# Altium PCB (2023-EE-021)Exp-6 rev_1.PcbDoc
Units mm, origin at the board's own origin, x right, y up, seen from the top; angles counter-clockwise.
Board outline 100.46 x 101.47 mm, 2 copper layers (Top Layer, Bottom Layer); 85 components, 132 nets, 297 pads, 76 vias.
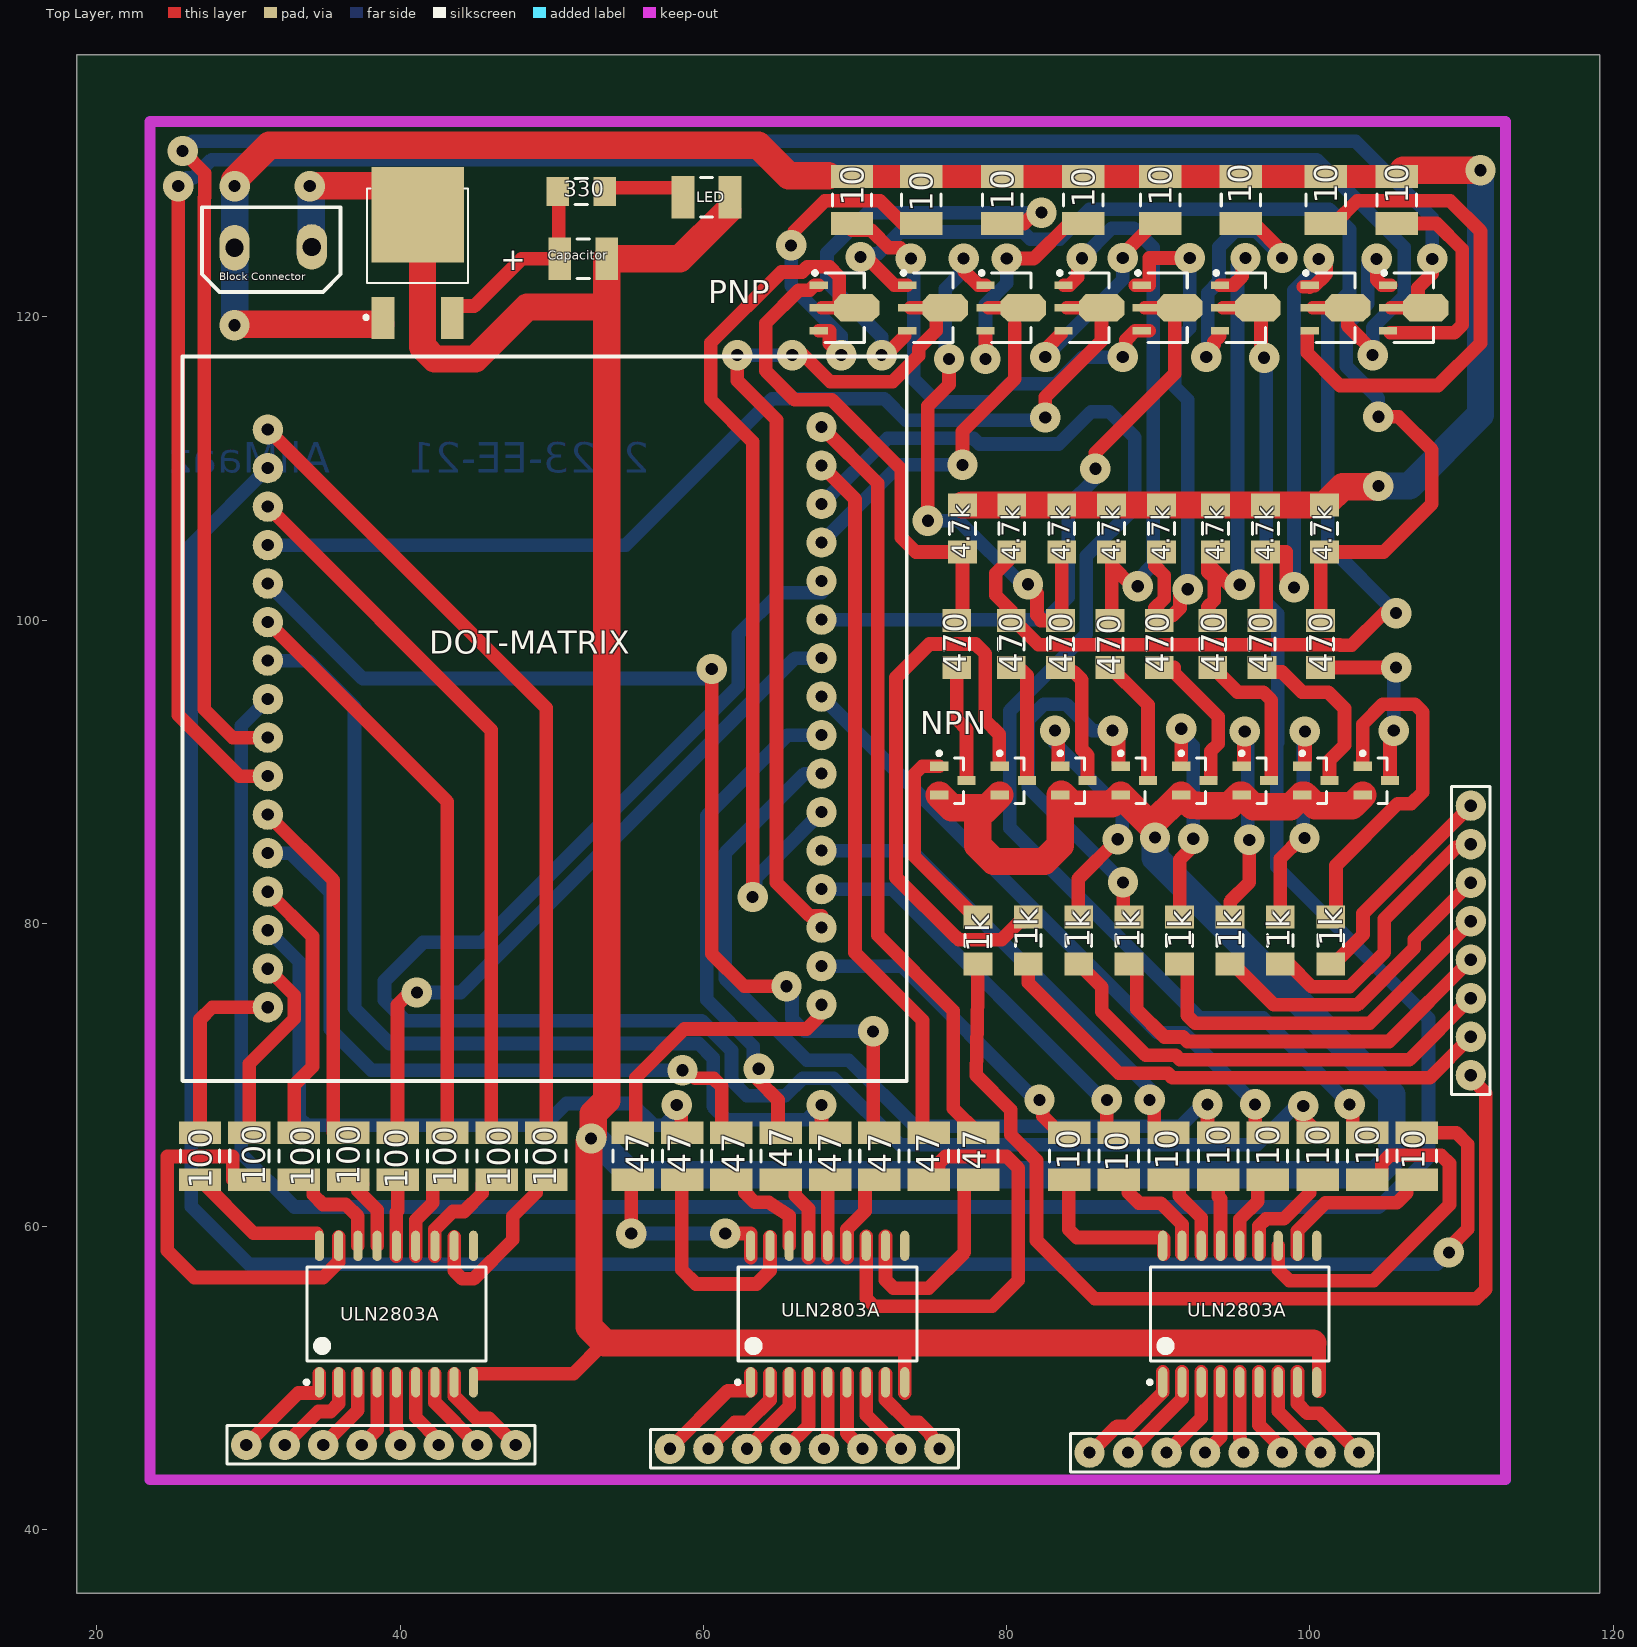
[diagram p0: Top Layer view]
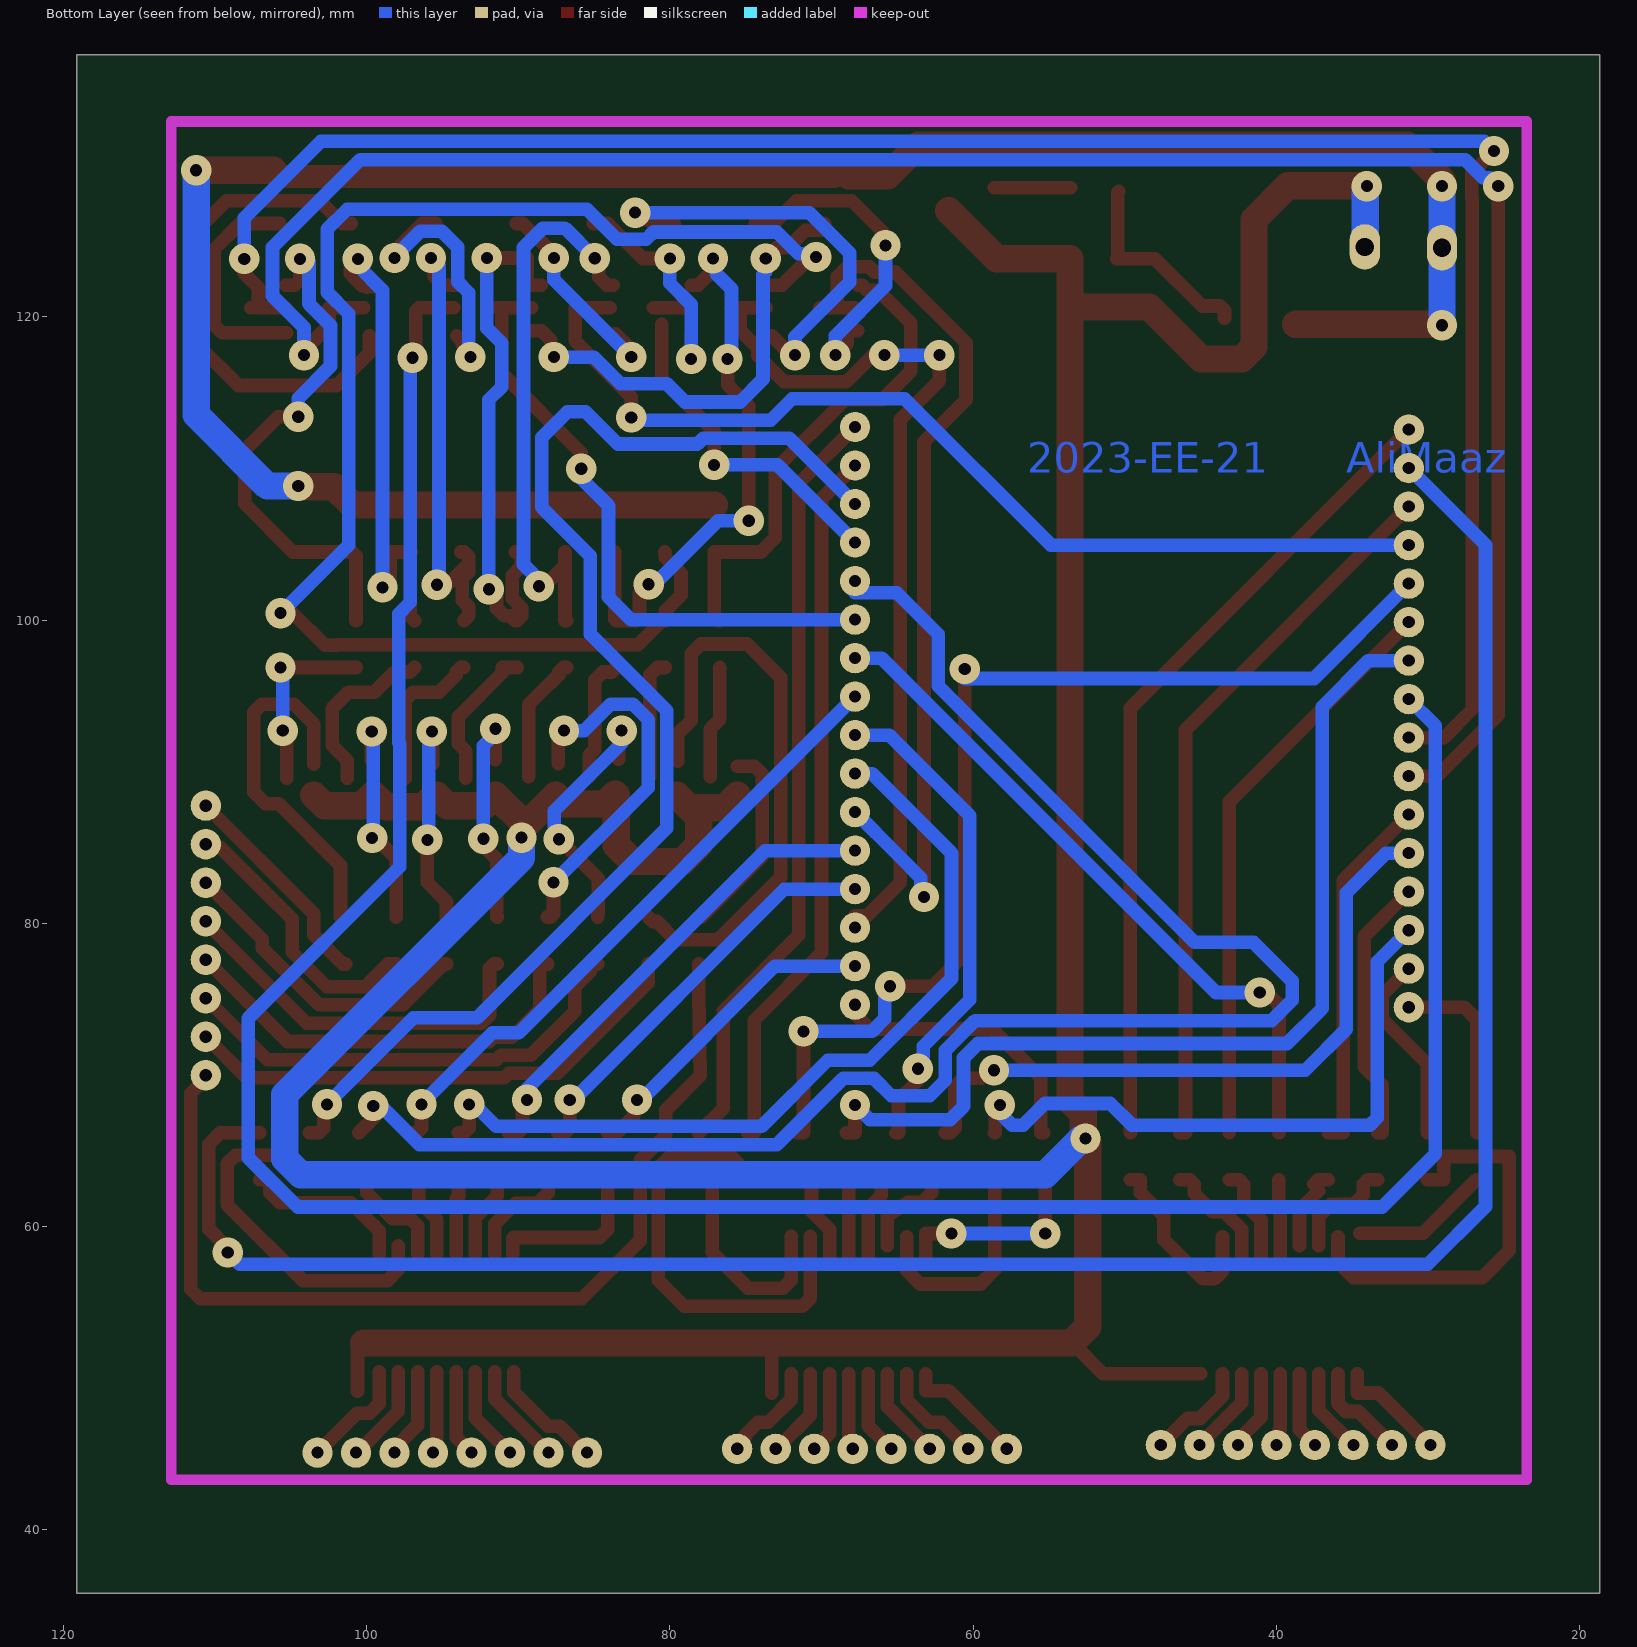
[diagram p1: Bottom Layer view, seen from below]

## Layer stack, top to bottom
Top Solder: solder mask 0.0102, Solder Resist, Dk 3.5
Top Layer: signal copper 0.0356
Dielectric 1: dielectric 0.32, FR-4, Dk 4.8
Bottom Layer: signal copper 0.0356
Bottom Solder: solder mask 0.0102, Solder Resist, Dk 3.5

## Board outline
18.669,35.814 119.126,35.814 119.126,137.287 18.669,137.287

## Design rules (kind name [scope] priority, off if disabled: settings)
Clearance [All] p1: gap=0.3 ignorepadtopadclearanceinfootprint=FALSE
PolygonConnect [All] p1: connectstyle=Relief reliefconductorwidth=0.254 reliefentries=4 polygonreliefangle="90 Angle" airgapwidth=0.254
RoutingVias [All] p1: holewidth=0.8 width=2 viastyle="Through Hole" minholewidth=0.8 minwidth=2 maxholewidth=0.8 maxwidth=2
SolderMaskExpansion [All] p1: expansion=0.102 istentingtop=FALSE
Width [All] p1: maxlimit=2 minlimit=0.8 preferedwidth=0.9 minimp=50.000000 maximp=50.000000 favimp=50.000000
30 further rules are at their usual default settings.

## Components (designator, comment, footprint, x,y, rotation, side; value= is the part's Value field where it differs from the comment)
1k "Comment" RESC3216M 101.377,78.867 r90 top
1k "Comment" RESC3216M 98.053,78.867 r90 top
1k "Comment" RESC3216M 94.728,78.867 r90 top
1k "Comment" RESC3216M 91.404,78.867 r90 top
1k "Comment" RESC3216M 88.079,78.867 r90 top
1k "Comment" RESC3216M 84.754,78.867 r90 top
1k "Comment" RESC3216M 81.43,78.867 r90 top
1k "Comment" RESC3216M 78.105,78.867 r90 top
4.7k "Comment" RESC3216M 77.089,106.045 r90 top
4.7k "Comment" RESC3216M 80.343,106.045 r90 top
4.7k "Comment" RESC3216M 83.634,106.045 r90 top
4.7k "Comment" RESC3216M 86.924,106.045 r90 top
4.7k "Comment" RESC3216M 93.78,106.045 r90 top
4.7k "Comment" RESC3216M 90.215,106.045 r90 top
4.7k "Comment" RESC3216M 97.071,106.045 r90 top
4.7k "Comment" RESC3216M 100.965,106.045 r90 top
10 "Comment" RESC3225M 105.743,127.707 r90 top
10 "Comment" RESC3225M 101.044,127.707 r90 top
10 "Comment" RESC3225M 95.456,127.707 r90 top
10 "Comment" RESC3225M 69.802,127.707 r90 top
10 "Comment" RESC3225M 90.122,127.707 r90 top
10 "Comment" RESC3225M 85.042,127.707 r90 top
10 "Comment" RESC3225M 79.708,127.707 r90 top
10 "Comment" RESC3225M 74.374,127.707 r90 top
10 "Comment" RESC3225M 107.061,64.643 r90 top
10 "Comment" RESC3225M 103.784,64.643 r90 top
10 "Comment" RESC3225M 100.507,64.643 r90 top
10 "Comment" RESC3225M 97.23,64.643 r90 top
10 "Comment" RESC3225M 93.953,64.643 r90 top
10 "Comment" RESC3225M 90.676,64.643 r90 top
10 "Comment" RESC3225M 87.399,64.643 r90 top
10 "Comment" RESC3225M 84.122,64.643 r90 top
47 "Comment" RESC3225M 78.12,64.643 r90 top
47 "Comment" RESC3225M 58.595,64.643 r90 top
47 "Comment" RESC3225M 68.358,64.643 r90 top
47 "Comment" RESC3225M 71.612,64.643 r90 top
47 "Comment" RESC3225M 74.866,64.643 r90 top
47 "Comment" RESC3225M 65.103,64.643 r90 top
47 "Comment" RESC3225M 61.849,64.643 r90 top
47 "Comment" RESC3225M 55.34,64.643 r90 top
100 "Comment" RESC3225M 49.625,64.643 r90 top
100 "Comment" RESC3225M 46.363,64.643 r90 top
100 "Comment" RESC3225M 43.102,64.643 r90 top
100 "Comment" RESC3225M 39.841,64.643 r90 top
100 "Comment" RESC3225M 36.58,64.643 r90 top
100 "Comment" RESC3225M 33.319,64.643 r90 top
100 "Comment" RESC3225M 30.058,64.643 r90 top
100 "Comment" RESC3225M 26.797,64.643 r90 top
330 "Comment" RESC3216M 51.943,128.27 r0 top
470 "Comment" RESC3216M 100.711,98.425 r90 top
470 "Comment" RESC3216M 96.853,98.425 r90 top
470 "Comment" RESC3216M 93.599,98.425 r90 top
470 "Comment" RESC3216M 90.07,98.425 r90 top
470 "Comment" RESC3216M 86.815,98.425 r90 top
470 "Comment" RESC3216M 83.561,98.425 r90 top
470 "Comment" RESC3216M 80.307,98.425 r90 top
470 "Comment" RESC3216M 76.708,98.425 r90 top
Capacitor "Comment" CAPC3225M 52.07,123.825 r0 top
DOT-MATRIX "Comment" "RGB 4.7X4.7" 49.53,93.599 r270 top
LED "Comment" RESC3225M 60.198,127.889 r0 top
NPN "Comment" SOT23-3L 88.425,89.408 r0 top
PNP "Comment" SOT89L 69.308,120.595 r0 top
ULN2803A "Comment" SOIC127P1030-18L 39.751,54.229 r90 top
ULN2803A "Comment" SOIC127P1030-18L 68.199,54.229 r90 top
ULN2803A "Comment" SOIC127P1030-18L 95.377,54.229 r90 top
? "Comment" SOT89L 80.304,120.595 r0 top
? "Comment" SOT23-3L 92.416,89.408 r0 top
? "Comment" *DPAK228P998X235-3N 41.148,124.266 r0 top
? "Comment" SOT89L 106.847,120.595 r0 top
? "Comment" SOT89L 101.693,120.595 r0 top
? "Comment" SOT89L 95.767,120.595 r0 top
? "Comment" SOT89L 90.613,120.595 r0 top
? "Comment" SOT89L 85.459,120.595 r0 top
? "Comment" SOT89L 75.15,120.595 r0 top
? "Comment" SOT23-3L 104.387,89.408 r0 top
? "Comment" SOT23-3L 100.397,89.408 r0 top
? "Comment" SOT23-3L 96.406,89.408 r0 top
? "Comment" SOT23-3L 84.435,89.408 r0 top
? "Comment" SOT23-3L 80.444,89.408 r0 top
? "Comment" SOT23-3L 76.454,89.408 r0 top
? "Comment" HDR1X8#1 110.617,69.977 r90 top
? "Comment" HDR1X8#1 85.471,45.085 r0 top
? "Comment" HDR1X8#1 29.845,45.593 r0 top
? "Comment" HDR1X8#2 57.785,45.339 r0 top
? "Comment" "PCB Block Connector" 31.623,124.587 r0 top

## Footprints (in the part's own frame and the unit in brackets; to place one, negate y for a bottom-side part, rotate by r counter-clockwise, add the part's x,y. Pads: shape width x height; smd on the part's side, far side on the other; paste and mask are expansions set on the pad)
*DPAK228P998X235-3N [mm]
  rect 1.5x2.8 smd: 1(-2.28,-4.34) 3(2.28,-4.34)
  rect 6.1x6.3 smd: 2(0,2.48)
  silkscreen extent -3.52,-4.42 3.33,4.2
CAPC3225M [mm] "Chip Capacitor, Body 3.2x2.5mm, IPC Low Density"
  rect 1.5x2.8 smd: 1(-1.55,0) 2(1.55,0)
  silkscreen extent -0.4,-1.3 0.4,1.3, body extent -1.7,-1.35 1.7,1.35, height 1.35
HDR1X8#1 [mm]
  round 2 hole 0.8: 1(0,0) 2(2.54,0) 3(5.08,0) 4(7.62,0) 5(10.16,0) 6(12.7,0) 7(15.24,0) 8(17.78,0)
  silkscreen extent -1.27,-1.27 19.05,1.27
HDR1X8#2 [mm]
  round 2 hole 0.8: 1(0,0) 2(2.54,0) 3(5.08,0) 4(7.62,0) 5(10.16,0) 6(12.7,0) 8(17.78,0) ""(15.24,0)
  silkscreen extent -1.27,-1.27 19.05,1.27
"PCB Block Connector" [mm]
  oval 2x3 hole 1.2: 1(-2.547,-0.023) 2(2.547,0.023)
  silkscreen extent -4.7,-2.94 4.45,2.65
RESC3216M [mm] "Chip Resistor, Body 3.2x1.6mm, IPC Low Density"
  rect 1.5x1.9 smd: 1(-1.55,0) 2(1.55,0)
  silkscreen extent -0.4,-0.85 0.4,0.85, body extent -1.68,-0.87 1.68,0.87, height 0.71
RESC3225M [mm] "Chip Resistor, Body 3.2x2.5mm, IPC Low Density"
  rect 1.5x2.8 smd: 1(-1.55,0) 2(1.55,0)
  silkscreen extent -0.4,-1.3 0.4,1.3, body extent -1.68,-1.32 1.68,1.32, height 0.71
"RGB 4.7X4.7" [mm]
  round 2 hole 0.8: 1(-18.966,-18.262) 2(-16.426,-18.262) 2(16.426,18.262) 3(-13.886,-18.262) 3(13.886,18.262) 4(-11.346,-18.262) 4(11.346,18.262) 5(-8.806,-18.262) 6(-6.266,-18.262) 7(-3.726,-18.262) 8(-1.186,-18.262) 9(1.354,-18.262) 10(3.894,-18.262) 11(6.434,-18.262) 12(8.974,-18.262) 13(11.514,-18.262) 14(14.054,-18.262) 15(16.594,-18.262) 16(19.134,-18.262) 17(18.966,18.262) 21(8.806,18.262) 22(6.266,18.262) 24(1.186,18.262) 25(-1.354,18.262) 26(-3.894,18.262) 27(-6.434,18.262) 28(-8.974,18.262) 29(-11.514,18.262) 30(-14.054,18.262) 31(-16.594,18.262) 32(-19.134,18.262) ""(3.726,18.262)
  silkscreen extent -23.78,-23.9 23.99,23.89
SOIC127P1030-18L [mm] "SOIC, 18-Leads, Body 11.6x7.5mm, Pitch 1.27mm, IPC High Density"
  oval 2x0.6 smd: 1(-4.5,5.08) 2(-4.5,3.81) 3(-4.5,2.54) 4(-4.5,1.27) 5(-4.5,0) 6(-4.5,-1.27) 7(-4.5,-2.54) 8(-4.5,-3.81) 9(-4.5,-5.08) 10(4.5,-5.08) 11(4.5,-3.81) 12(4.5,-2.54) 13(4.5,-1.27) 14(4.5,0) 15(4.5,1.27) 16(4.5,2.54) 17(4.5,3.81) 18(4.5,5.08)
  silkscreen extent -4.62,-5.9 3.1,6.05, body extent -3.8,-5.95 3.8,5.95, height 2.65
SOT23-3L [mm] "SOT23, 3-Leads, Body 2.9x1.3mm, Pitch 0.95mm, Lead Span 2.5mm, IPC High Density"
  rect 1.2x0.6 smd: 1(-0.9,0.95) 2(-0.9,-0.95) 3(0.9,0)
  silkscreen extent -1.02,-1.5 0.7,1.92, body extent -0.7,-1.5 0.7,1.5, height 1.1
SOT89L [mm] "SOT89, 3-Leads, Body 4.5x2.4 mm, Pitch 1.5mm, Lead Span 4.1mm, IPC High Density"
  rect 1.2x0.5 smd: 1(-1.7,1.5) 3(-1.7,-1.5)
  rect 1.6x0.5 smd: 2(-1.5,0)
  oct 3x1.8 smd: 2(0.8,0)
  silkscreen extent -2.07,-2.3 1.3,2.42, body extent -1.3,-2.3 1.3,2.3, height 1.6

## Via types
v1: diameter 2, hole 0.8, Top Layer to Bottom Layer, 76 vias

## Nets (pads, with @x,y where several pads share a name; then routed paths per layer and width w, separated by ;. In a path a pad name is that pad's centre, name@x,y a point inside that pad or via, vN(x,y) a via of type N, cw(c..) or ccw(c..) an arc to the next point about the centre after c; other vN are vias at no path point)
1: 47.2@55.341,66.193 DOT-MATRIX.17 | length 18.4
  Top Layer w0.9: 47.2@55.341,66.193 55.534,66.193 55.534,69.82 58.739,73.025 66.822,73.025 67.582,73.785 67.582,74.422 DOT-MATRIX.17
2: 10.2@84.122,66.193 DOT-MATRIX.2@67.792,77.173 | length 21.4
  Top Layer w0.9: v1(82.169,68.355) 82.379,68.145 82.379,67.285 83.472,66.193 10.2@84.122,66.193
  Bottom Layer w0.9: DOT-MATRIX.2@67.792,77.173 73.096,77.173 81.914,68.355 v1(82.169,68.355)
3: ?.2@73.65,120.595 ?.2@75.95,120.595 DOT-MATRIX.3@67.792,79.713 | length 59.9
  Top Layer w0.9: v1(62.23,117.475) 62.23,115.799 64.821,113.208 64.821,82.677 67.005,80.493 67.792,80.493 DOT-MATRIX.3@67.792,79.713 ; v1(65.862,117.475) 66.613,117.475 68.363,115.725 72.48,115.725 74.196,117.441 74.196,117.93 75.362,119.096 ?.2@75.362,120.595 ; ?.2@73.65,120.595 ?.2@75.362,120.595 ; ?.2@75.95,120.595 ?.2@75.362,120.595
  Bottom Layer w0.9: v1(62.23,117.475) v1(65.862,117.475)
4: 10.2@87.399,66.193 DOT-MATRIX.4@67.792,82.253 | length 27.3
  Top Layer w0.9: v1(86.614,68.355) 86.614,66.493 86.914,66.193 10.2@87.399,66.193
  Bottom Layer w0.9: DOT-MATRIX.4@67.792,82.253 72.461,82.253 86.359,68.355 v1(86.614,68.355)
5: 10.2@90.676,66.193 DOT-MATRIX.21 | length 31.9
  Top Layer w0.9: v1(89.434,68.355) 89.434,68.057 89.726,67.766 89.726,66.493 90.026,66.193 10.2@90.676,66.193
  Bottom Layer w0.9: DOT-MATRIX.21 73.729,84.793 89.434,69.087 v1(89.434,68.355)
6: DOT-MATRIX.22 PNP.2 | length 60.4
  Top Layer w0.9: v1(63.246,81.737) 63.246,111.76 60.478,114.528 60.478,118.289 65.154,122.964 66.511,122.964 66.842,123.295 68.319,123.295 68.961,122.653 PNP.2@68.961,120.595 ; PNP.2@67.808,120.595 PNP.2@68.961,120.595 ; PNP.2@70.108,120.595 PNP.2@68.961,120.595
  Bottom Layer w0.9: v1(63.246,81.737) 63.456,81.948 63.456,82.997 64.948,84.488 DOT-MATRIX.22
7: 10.2@93.953,66.193 DOT-MATRIX. | length 55.6
  Top Layer w0.9: v1(93.246,68.056) 93.246,66.493 93.546,66.193 10.2@93.953,66.193
  Bottom Layer w0.9: DOT-MATRIX. 66.675,89.873 61.431,84.629 61.431,76.364 66.824,70.971 69.592,70.971 73.959,66.605 91.453,66.605 92.904,68.056 v1(93.246,68.056)
8: 47.2@65.103,66.193 DOT-MATRIX.24 | length 32.8
  Top Layer w0.9: v1(63.652,70.409) 63.652,69.621 64.922,68.351 64.922,66.193 47.2@65.103,66.193
  Bottom Layer w0.9: v1(63.652,70.409) 63.295,70.767 63.295,71.891 60.231,74.954 60.231,87.104 65.539,92.413 DOT-MATRIX.24
9: 10.2@97.23,66.193 DOT-MATRIX.25 | length 42.3
  Top Layer w0.9: v1(96.393,68.056) 96.393,66.493 96.693,66.193 10.2@97.23,66.193
  Bottom Layer w0.9: DOT-MATRIX.25 89.974,72.771 91.722,72.771 96.393,68.1 v1(96.393,68.056)
10: 100.2@39.841,66.193 DOT-MATRIX.26 | length 45.9
  Top Layer w0.9: 100.2@39.841,66.193 39.827,66.193 39.827,74.625 40.64,75.438 v1(41.097,75.438)
  Bottom Layer w0.9: v1(41.097,75.438) 43.993,75.438 66.047,97.493 DOT-MATRIX.26
11: ?.2@89.113,120.595 ?.2@91.413,120.595 DOT-MATRIX.27 | length 41.2
  Top Layer w0.9: v1(85.852,109.982) 85.852,111.023 91.087,116.258 ?.2@91.087,120.595 ; ?.2@89.113,120.595 ?.2@91.087,120.595 ; ?.2@91.413,120.595 ?.2@91.087,120.595
  Bottom Layer w0.9: DOT-MATRIX.27 67.792,100.025 82.572,100.025 84.057,101.51 84.057,107.552 85.852,109.347 v1(85.852,109.982)
12: 10.2@100.507,66.193 DOT-MATRIX.28 | length 113.4
  Top Layer w0.9: v1(99.568,67.945) 99.568,67.386 99.441,67.259 10.2@100.507,66.193
  Bottom Layer w0.9: DOT-MATRIX.28 67.792,101.803 65.047,101.803 62.304,99.06 62.304,95.654 45.39,78.74 41.505,78.74 38.965,76.2 38.965,74.93 40.311,73.584 59.875,73.584 61.849,71.609 61.849,69.647 62.865,68.631 65.405,68.631 66.545,69.771 68.58,69.771 72.946,65.405 96.528,65.405 99.068,67.945 v1(99.568,67.945)
13: ?.2@78.805,120.595 ?.2@81.105,120.595 DOT-MATRIX.29 | length 24.4
  Top Layer w0.9: v1(77.089,110.236) 77.089,112.46 80.546,115.917 80.546,119.504 ; ?.2@78.805,120.595 ?.2@81.105,120.595
  Bottom Layer w0.9: DOT-MATRIX.29 72.915,110.236 v1(77.089,110.236)
14: 10.2@103.784,66.193 DOT-MATRIX.30 | length 86.1
  Top Layer w0.9: v1(102.621,68.056) 102.621,67.758 102.834,67.546 102.834,66.493 103.134,66.193 10.2@103.784,66.193
  Bottom Layer w0.9: DOT-MATRIX.30 72.125,111.986 77.814,111.986 78.19,111.61 83.442,111.61 85.573,113.741 86.766,113.741 88.462,112.046 88.462,107.436 85.257,104.231 85.257,99.075 80.213,94.031 80.213,86.28 92.732,73.762 96.927,73.762 100.535,70.154 102.621,68.067 v1(102.621,68.056)
15: 47.2@74.866,66.193 DOT-MATRIX.31 | length 47.2
  Top Layer w0.9: DOT-MATRIX.31 70.002,107.982 70.002,78.054 74.447,73.609 74.447,66.193 47.2@74.866,66.193
16: 47.2@78.12,66.193 DOT-MATRIX.32 | length 50.8
  Top Layer w0.9: DOT-MATRIX.32 71.504,109.02 71.504,79.22 76.486,74.238 76.486,67.786 78.079,66.193 47.2@78.12,66.193
17: 100.2@49.624,66.193 DOT-MATRIX.1 | length 54
  Top Layer w0.9: DOT-MATRIX.1 49.632,94.202 49.632,66.193 100.2@49.624,66.193
18: 10.2@107.061,66.193 DOT-MATRIX.2@31.268,110.025 | length 147
  Top Layer w0.9: 10.2@107.061,66.193 109.651,66.193 110.411,65.433 110.411,59.832 109.169,58.591 v1(109.169,58.293)
  Bottom Layer w0.9: DOT-MATRIX.2@31.268,110.025 26.213,104.97 26.213,61.316 30.02,57.508 108.384,57.508 v1(109.169,58.293)
19: 100.2@46.363,66.193 DOT-MATRIX.3@31.268,107.485 | length 47.8
  Top Layer w0.9: DOT-MATRIX.3@31.268,107.485 45.999,92.754 45.999,66.193 100.2@46.363,66.193
20: ?.2@83.959,120.595 ?.2@86.259,120.595 DOT-MATRIX.4@31.268,104.945 | length 67
  Top Layer w0.9: v1(82.55,113.36) 82.55,114.717 86.259,118.426 86.259,120.595 ?.2@83.959,120.595
  Bottom Layer w0.9: DOT-MATRIX.4@31.268,104.945 54.875,104.945 64.531,114.601 71.936,114.601 73.352,113.186 82.376,113.186 v1(82.55,113.36)
21: 47.2@71.612,66.193 DOT-MATRIX.5 | length 72.2
  Top Layer w0.9: v1(60.554,96.774) 60.554,77.982 62.689,75.847 v1(65.481,75.847) ; v1(71.196,72.873) 71.196,66.193 47.2@71.612,66.193
  Bottom Layer w0.9: DOT-MATRIX.5 37.522,96.151 60.554,96.151 v1(60.554,96.774) ; v1(65.481,75.847) 65.844,75.484 65.844,73.704 66.675,72.873 v1(71.196,72.873)
22: 100.2@43.102,66.193 DOT-MATRIX.6 | length 38.6
  Top Layer w0.9: DOT-MATRIX.6 43.104,88.03 43.104,66.193 100.2@43.102,66.193
23: 47.2@68.357,66.193 DOT-MATRIX.7 | length 65.4
  Top Layer w0.9: v1(67.793,68.021) 67.793,66.193 47.2@68.357,66.193
  Bottom Layer w0.9: DOT-MATRIX.7 33.942,97.325 36.982,94.285 36.982,74.389 39.3,72.071 59.69,72.071 60.639,71.122 60.639,67.926 61.512,67.053 66.824,67.053 v1(67.793,68.021)
24: ?.2@94.267,120.595 ?.2@96.567,120.595 DOT-MATRIX.8 | length 174.9
  Top Layer w0.9: ?.2@94.267,120.595 96.567,120.595 96.775,120.387 96.775,117.515 v1(96.982,117.308)
  Bottom Layer w0.9: DOT-MATRIX.8 29.515,93.032 29.515,64.795 33.02,61.29 104.555,61.29 107.823,64.558 107.823,73.725 97.818,83.73 97.818,91.853 97.889,91.924 97.889,100.409 97.127,101.171 97.127,117.162 v1(96.982,117.308)
25: ?.2@105.348,120.595 ?.2@107.648,120.595 DOT-MATRIX.9 | length 135.8
  Top Layer w0.9: v1(25.654,130.937) 27.114,129.477 27.114,127.9 27.079,127.865 27.079,94.121 28.955,92.245 DOT-MATRIX.9 ; ?.2@105.348,120.595 ?.2@107.137,120.595 ; ?.2@107.648,120.595 ?.2@107.137,120.595 ; v1(108.077,123.825) 108.077,122.86 107.137,121.92 ?.2@107.137,120.595
  Bottom Layer w0.9: v1(25.654,130.937) 26.289,131.572 103.032,131.572 108.077,126.527 v1(108.077,123.825)
26: ?.2@100.193,120.595 ?.2@102.493,120.595 DOT-MATRIX.10 | length 141
  Top Layer w0.9: v1(25.364,128.625) 25.364,93.741 29.4,89.705 DOT-MATRIX.10 ; ?.2@100.193,120.595 102.493,120.595 102.493,119.427 v1@104.445,117.475 ; v1(104.14,117.475) v1@104.445,117.475 ; v1@104.521,117.399 v1@104.445,117.475
  Bottom Layer w0.9: v1(25.364,128.625) 25.926,129.187 26.379,129.187 27.564,130.372 100.435,130.372 106.22,124.587 106.22,121.374 104.14,119.294 v1(104.14,117.475)
27: 100.2@36.58,66.193 DOT-MATRIX.11 | length 23.8
  Top Layer w0.9: DOT-MATRIX.11 35.585,82.848 35.585,66.193 100.2@36.58,66.193
28: 47.2@61.849,66.193 DOT-MATRIX.12 | length 45.1
  Top Layer w0.9: v1(58.623,70.307) 58.921,70.307 59.454,69.774 60.672,69.774 61.199,69.247 61.199,66.493 61.499,66.193 47.2@61.849,66.193
  Bottom Layer w0.9: DOT-MATRIX.12 32.773,84.625 35.383,82.016 35.383,73.024 38.1,70.307 v1(58.623,70.307)
29: 100.2@33.319,66.193 DOT-MATRIX.13 | length 17.9
  Top Layer w0.9: DOT-MATRIX.13 34.218,79.135 34.218,70.545 33.02,69.347 33.02,66.193 100.2@33.319,66.193
30: 47.2@58.595,66.193 DOT-MATRIX.14 | length 42.4
  Top Layer w0.9: v1(58.242,68.021) 58.547,67.716 58.547,66.193 47.2@58.595,66.193
  Bottom Layer w0.9: DOT-MATRIX.14 33.346,77.468 33.346,67.175 33.832,66.688 49.53,66.688 50.96,68.118 55.275,68.118 56.704,66.688 57.432,66.688 58.242,67.498 v1(58.242,68.021)
31: 100.2@30.058,66.193 DOT-MATRIX.15 | length 12.8
  Top Layer w0.9: 100.2@30.058,66.193 30.048,66.193 30.048,70.739 33.018,73.709 33.018,75.255 DOT-MATRIX.15
32: 100.2@26.797,66.193 DOT-MATRIX.16 | length 12.3
  Top Layer w0.9: 100.2@26.797,66.193 26.797,73.66 27.602,74.465 DOT-MATRIX.16
a: 330.1 ?.3@43.428,119.926 Capacitor.1 | length 13.5
  Top Layer w0.9: ?.3@43.428,119.926 43.428,120.416 43.728,120.716 44.897,120.716 48.006,123.825 Capacitor.1 50.456,123.888 50.456,128.207 330.1
b: 330.2 LED.1 | length 5.1
  Top Layer w0.9: 330.2@53.566,128.524 LED.1@58.62,128.524
b1: 10.1@84.122,63.093 ULN2803A.18@90.297,58.729 | length 10.6
  Top Layer w0.9: 10.1@84.122,63.093 84.122,62.815 84.099,62.793 84.099,59.806 84.627,59.279 ULN2803A.18@90.147,59.279 ; ULN2803A.18@90.297,59.279 90.367,59.209 ULN2803A.18@90.367,58.799 ; ULN2803A.18@90.367,58.166 ULN2803A.18@90.367,58.659
b2: 10.1@87.399,63.093 ULN2803A.17@91.567,58.729 | length 7.9
  Top Layer w0.9: 10.1@87.399,63.093 88.036,63.093 88.036,62.23 88.722,61.544 90.17,61.544 91.567,60.147 91.567,58.729 ULN2803A.17@91.567,58.166
b3: 10.1@90.676,63.093 ULN2803A.16@92.837,58.729 | length 6.2
  Top Layer w0.9: 10.1@90.676,63.093 91.39,63.093 91.39,62.022 92.837,60.574 92.837,58.729 ULN2803A.16@92.837,58.166
b4: 10.1@93.953,63.093 ULN2803A.15@94.107,58.729 | length 5
  Top Layer w0.9: 10.1@93.953,63.093 93.953,61.983 94.107,61.829 94.107,58.729 ULN2803A.15@94.107,58.166
b5: 10.1@97.23,63.093 ULN2803A.14@95.377,58.729 | length 6.1
  Top Layer w0.9: ULN2803A.14@95.377,58.166 95.377,58.729 95.377,60.477 96.571,61.671 96.571,63.093 10.1@97.23,63.093
b6: 10.1@100.507,63.093 ULN2803A.13@96.647,58.729 | length 7.5
  Top Layer w0.9: ULN2803A.13@96.647,58.166 96.647,58.729 96.647,60.05 97.099,60.503 98.273,60.503 100,62.23 100,63.093 10.1@100.507,63.093
b7: 10.1@103.784,63.093 ULN2803A.12@97.917,58.729 | length 24.7
  Top Layer w0.9: ULN2803A.12@97.917,58.729 97.917,57.15 98.635,56.432 104.209,56.432 109.211,61.434 109.211,64.154 108.672,64.693 105.261,64.693 104.734,64.166 104.734,63.393 104.434,63.093 10.1@103.784,63.093
b8: 10.1@107.061,63.093 ULN2803A.11@99.187,58.729 | length 11.3
  Top Layer w0.9: ULN2803A.11@99.187,58.166 99.187,58.729 99.187,59.72 101.036,61.57 105.74,61.57 106.401,62.23 106.401,63.093 10.1@107.061,63.093
c1: 1k.1@78.105,77.317 ?.1@110.617,69.977 | length 65.9
  Top Layer w0.9: 1k.1@78.105,77.317 78.105,75.26 78.003,69.96 80.27,67.693 80.27,66.054 81.972,64.353 81.972,59.074 85.815,55.232 110.979,55.232 111.611,55.864 111.611,68.795 110.617,69.789 ?.1@110.617,69.977
c2: 1k.1@81.43,77.317 ?.2@110.617,72.517 | length 34.1
  Top Layer w0.9: 1k.1@81.43,77.317 81.43,76.076 87.4,70.105 90.641,70.105 90.94,69.806 107.906,69.806 ?.2@110.617,72.517
c3: 1k.1@84.754,77.317 ?.3@110.617,75.057 | length 31.2
  Top Layer w0.9: 1k.1@84.754,77.317 84.954,77.317 85.254,77.017 85.254,76.817 86.284,75.787 86.284,74.187 89.165,71.305 91.138,71.305 91.437,71.006 106.566,71.006 ?.3@110.617,75.057
c4: 1k.1@88.079,77.317 ?.4@110.617,77.597 | length 28.5
  Top Layer w0.9: 1k.1@88.079,77.317 88.279,77.317 88.579,77.017 88.579,74.33 90.404,72.505 91.635,72.505 91.934,72.206 105.226,72.206 ?.4@110.617,77.597
c5: 1k.1@91.404,77.317 ?.5@110.617,80.137 | length 25.5
  Top Layer w0.9: 1k.1@91.404,77.317 91.604,77.317 91.904,77.017 91.904,73.933 92.431,73.406 103.951,73.406 110.617,80.072 ?.5@110.617,80.137
c6: 1k.1@94.728,77.317 ?.6@110.617,82.677 | length 20.7
  Top Layer w0.9: 1k.1@94.728,77.317 94.928,77.317 97.628,74.617 103.135,74.617 106.888,78.37 106.888,78.948 ?.6@110.617,82.677
c7: 1k.1@98.053,77.317 ?.7@110.617,85.217 | length 18.4
  Top Layer w0.9: 1k.1@98.053,77.317 98.617,77.317 100.117,75.817 102.638,75.817 104.918,78.097 104.918,80.28 106.807,82.169 109.645,85.007 110.407,85.007 ?.7@110.617,85.217
c8: 1k.1@101.377,77.317 ?.8@110.617,87.757 | length 14.4
  Top Layer w0.9: 1k.1@101.377,77.317 101.577,77.317 103.505,79.244 103.505,80.645 ?.8@110.617,87.757
d1: 470.1@76.708,96.875 ?.3@77.354,89.408 | length 7.5
  Top Layer w0.9: 470.1@76.708,96.875 76.708,93.458 77.354,92.812 ?.3@77.354,89.662
d2: 470.1@80.307,96.875 ?.3@81.344,89.408 | length 7.9
  Top Layer w0.9: 470.1@80.307,96.875 80.831,96.875 81.344,96.361 ?.3@81.344,89.662
d3: 470.1@83.561,96.875 ?.3@85.335,89.408 | length 8.3
  Top Layer w0.9: 470.1@83.561,96.875 83.861,96.575 84.436,96.575 84.963,96.048 84.963,91.465 85.335,91.094 ?.3@85.335,89.662
d4: 470.1@86.815,96.875 NPN.3 | length 8.4
  Top Layer w0.9: 470.1@86.815,96.875 87.015,96.875 87.315,96.575 87.315,96.412 87.843,95.885 87.859,95.885 89.325,94.418 NPN.3@89.325,89.662
d5: 470.1@90.07,96.875 ?.3@93.316,89.408 | length 9.7
  Top Layer w0.9: 470.1@90.07,96.875 91.059,96.875 91.059,96.52 93.956,93.623 93.956,91.848 93.466,91.358 ?.3@93.466,89.558
d6: 470.1@93.599,96.875 ?.3@97.306,89.408 | length 10
  Top Layer w0.9: 470.1@93.599,96.875 93.799,96.875 94.099,96.575 94.099,96.375 95.224,95.25 96.929,95.25 97.456,94.723 ?.3@97.456,89.558
d7: 470.1@96.853,96.875 ?.3@101.297,89.408 | length 11.6
  Top Layer w0.9: 470.1@96.853,96.875 97.153,96.575 98.162,96.575 99.487,95.25 101.203,95.25 102.287,94.166 102.287,91.746 101.297,90.756 ?.3@101.297,89.56
d8: 470.1@100.711,96.875 ?.3@105.287,89.408 | length 12.5
  Top Layer w0.9: 470.1@100.711,96.875 v1(105.689,96.875) ; ?.3@105.283,89.558 105.283,92.158 105.537,92.412 v1(105.537,92.71)
  Bottom Layer w0.9: v1(105.537,92.71) 105.537,96.723 v1(105.689,96.875)
f1: 1k.2@78.105,80.417 ?.1@75.554,90.358 | length 13.1
  Top Layer w0.9: ?.1@75.554,90.358 74.431,90.358 73.904,89.831 73.904,84.418 77.905,80.417 1k.2@78.105,80.417
f2: 1k.2@81.43,80.417 ?.1@79.544,90.358 | length 38.8
  Top Layer w0.9: 79.502,90.678 79.502,92.481 78.588,93.396 78.588,97.79 77.953,98.425 74.909,98.425 72.704,96.22 72.704,83.023 76.606,79.121 76.64,79.121 76.844,78.917 79.659,78.917 80.859,80.117 81.13,80.117 1k.2@81.43,80.417
f3: 1k.2@84.754,80.417 ?.1@83.535,90.358 | length 17.3
  Top Layer w0.9: v1(83.185,92.71) 83.395,92.5 83.395,90.817 ; 1k.2@84.754,80.417 84.754,80.697 84.734,80.717 84.734,82.95 v1(87.328,85.544)
  Bottom Layer w0.9: v1(83.185,92.71) 83.185,91.872 87.63,87.427 87.63,86.36 87.376,86.106 87.376,85.591 v1(87.328,85.544)
f4: 1k.2@88.079,80.417 NPN.1 | length 24.9
  Top Layer w0.9: v1(86.993,92.71) 87.376,92.327 NPN.1@87.376,90.536 ; v1(87.681,82.702) 87.681,80.62 87.884,80.417 1k.2@88.079,80.417
  Bottom Layer w0.9: v1(86.993,92.71) 85.66,92.71 83.91,94.46 82.46,94.46 81.435,93.435 81.435,88.948 v1(87.681,82.702)
f5: 1k.2@91.404,80.417 ?.1@91.516,90.358 | length 15.2
  Top Layer w0.9: 1k.2@91.404,80.417 91.415,80.417 91.415,84.201 92.31,85.097 v1(92.31,85.582) ; 91.516,90.805 v1(91.516,92.837)
  Bottom Layer w0.9: v1(91.516,92.837) 91.516,92.507 92.31,91.713 v1(92.31,85.582)
f6: 1k.2@94.728,80.417 ?.1@95.506,90.358 | length 15.1
  Top Layer w0.9: 1k.2@94.728,80.417 94.742,80.417 94.742,81.432 96.012,82.702 96.012,85.493 v1(96.003,85.502) ; ?.1@95.652,90.508 95.652,92.595 v1(95.706,92.649)
  Bottom Layer w0.9: v1(95.706,92.649) 95.909,92.446 95.909,85.595 v1(96.003,85.502)
f7: 1k.2@98.053,80.417 ?.1@99.497,90.358 | length 15
  Top Layer w0.9: 1k.2@98.053,80.417 98.053,84.26 99.42,85.628 v1(99.647,85.628) ; v1(99.67,92.649) 99.684,92.635 99.684,90.756
  Bottom Layer w0.9: v1(99.647,85.628) 99.568,85.707 99.568,92.547 v1(99.67,92.649)
f8: 1k.2@101.377,80.417 ?.1@103.487,90.358 | length 24.1
  Top Layer w0.9: 1k.2@101.377,80.417 101.727,80.417 101.727,83.82 105.803,87.896 106.692,87.896 107.442,88.646 107.442,93.933 106.915,94.46 104.812,94.46 103.487,93.135 ?.1@103.487,90.508
g1: 47.1@55.341,63.093 ULN2803A.18@63.119,58.729 | length 13.1
  Top Layer w0.9: v1(55.245,59.538) 55.245,63.093 47.1@55.341,63.093 ; v1(61.443,59.538) 63.119,59.538 63.119,58.729 ULN2803A.18@63.119,57.958
  Bottom Layer w0.9: v1(55.245,59.538) v1(61.443,59.538)
g2: 47.1@58.595,63.093 ULN2803A.17@64.389,58.729 | length 14.8
  Top Layer w0.9: 47.1@58.595,63.093 58.572,63.093 58.572,57.15 59.512,56.21 63.5,56.21 64.389,57.099 64.389,58.729 ULN2803A.17@64.389,59.335
g3: 47.1@61.849,63.093 ULN2803A.16@65.659,58.729 | length 6.5
  Top Layer w0.9: 47.1@61.849,63.093 47.1@62.509,63.093 ; 47.1@62.738,62.611 62.738,62.248 63.393,61.593 64.311,61.593 64.534,61.449 65.659,60.72 ULN2803A.16@65.659,58.729
g4: 47.1@65.103,63.093 ULN2803A.15@66.929,58.729 | length 6.3
  Top Layer w0.9: 47.1@65.103,63.093 65.753,63.093 66.053,62.793 66.053,62.044 66.929,61.168 ULN2803A.15@66.929,57.958
g5: 47.1@68.357,63.093 ULN2803A.14@68.199,58.729 | length 5.2
  Top Layer w0.9: ULN2803A.14@68.199,57.958 68.199,62.934 47.1@68.357,63.093
g6: 47.1@71.612,63.093 ULN2803A.13@69.469,58.729 | length 6.4
  Top Layer w0.9: ULN2803A.13@69.469,57.958 69.469,58.729 69.469,59.817 70.662,61.01 70.662,62.793 70.962,63.093 47.1@71.612,63.093
g7: 47.1@74.866,63.093 ULN2803A.12@70.739,58.729 | length 29.9
  Top Layer w0.9: ULN2803A.12@70.739,59.355 70.739,55.264 71.266,54.737 79.057,54.737 80.772,56.452 80.772,63.856 80.01,64.618 75.971,64.618 75.514,64.16 75.514,63.093 47.1@74.866,63.093
g8: 47.1@78.12,63.093 ULN2803A.11@72.009,58.729 | length 14.8
  Top Layer w0.9: ULN2803A.11@72.009,59.355 72.009,58.729 72.009,56.464 72.536,55.937 74.86,55.937 77.216,58.293 77.216,62.793 77.516,63.093 47.1@78.12,63.093
gnd: ?.2@34.17,124.61 ?.2@41.148,126.746 ?.2@75.554,88.458 ?.2@79.544,88.458 ?.2@83.535,88.458 ?.2@91.516,88.458 ?.2@95.506,88.458 ?.2@99.497,88.458 ?.2@103.487,88.458 Capacitor.2 LED.2 NPN.2 ULN2803A.9 | length 302.1
  Top Layer w0.9: ULN2803A.9@44.981,50.279 45.381,50.279 45.394,50.292 51.435,50.292 53.486,52.343 ; ULN2803A.9@73.279,49.022 73.279,49.729 73.279,52.324 ; 100.203,52.324 100.607,51.92 100.607,49.729 ULN2803A.9@100.607,49.149
  Top Layer w1.8: v1(34.036,128.622) 34.065,128.651 39.243,128.651 41.478,126.416 41.478,118.029 42.286,117.221 44.958,117.221 48.387,120.65 53.62,120.65 ; LED.2@61.621,127 58.446,123.825 Capacitor.2 53.62,120.65 ; ?.2@75.554,88.458 76.382,87.63 78.716,87.63 ; ?.2@79.544,88.458 78.716,87.63 ; ?.2@83.535,88.458 83.535,87.872 83.535,85.138 82.48,84.084 79.159,84.084 78.105,85.138 78.105,87.019 78.716,87.63 ; ?.2@83.611,88.534 84.274,87.872 86.939,87.872 NPN.2 89.521,86.463 91.516,88.458 92.192,87.782 92.609,87.782 92.632,87.758 94.689,87.758 95.389,88.458 95.506,88.458 96.28,87.684 98.723,87.684 ?.2@99.497,88.458 ; ?.2@99.65,88.458 100.35,87.758 102.787,87.758 ?.2@103.487,88.458 ; 100.203,52.324 73.279,52.324 53.505,52.324 53.486,52.343 52.451,53.378 52.451,65.605 52.598,65.751 v1(52.598,65.806) 52.598,65.86 52.741,66.003 52.741,67.44 53.62,68.32 53.62,120.65
  Bottom Layer w1.8: v1(34.036,128.622) 34.036,128.568 34.132,128.472 34.132,124.387 ?.2@34.078,124.333 ; v1(52.598,65.806) 52.636,65.767 52.902,65.767 55.245,63.424 104.356,63.424 105.41,64.478 105.41,68.707 89.789,84.328 v1(89.789,85.65)
j1: ?.1@29.845,45.593 ULN2803A.1@34.671,49.729 | length 7.5
  Top Layer w0.9: ?.1@29.845,45.593 33.274,49.022 34.671,49.022 34.671,49.729 ULN2803A.1@34.671,50.292
j2: ?.2@32.385,45.593 ULN2803A.2@35.941,49.729 | length 6.7
  Top Layer w0.9: ?.2@32.385,45.593 34.595,47.803 35.414,47.803 35.941,48.33 35.941,49.729 ULN2803A.2@35.941,50.292
j3: ?.3@34.925,45.593 ULN2803A.3@37.211,49.729 | length 5.6
  Top Layer w0.9: ?.3@34.925,45.593 37.211,47.879 37.211,49.729 ULN2803A.3@37.211,50.292
j4: ?.4@37.465,45.593 ULN2803A.4@38.481,49.729 | length 5.1
  Top Layer w0.9: ?.4@37.465,45.593 38.481,46.609 38.481,49.729 ULN2803A.4@38.481,50.292
j5: ?.5@40.005,45.593 ULN2803A.5@39.751,49.729 | length 4.8
  Top Layer w0.9: ULN2803A.5@39.751,50.292 39.751,49.729 39.751,46.625 39.795,46.581 39.795,45.803 ?.5@40.005,45.593
j6: ?.6@42.545,45.593 ULN2803A.6@41.021,49.729 | length 5.3
  Top Layer w0.9: ULN2803A.6@41.021,50.292 41.021,49.729 41.021,47.415 42.545,45.891 ?.6@42.545,45.593
j7: ?.7@45.085,45.593 ULN2803A.7@42.291,49.729 | length 5.9
  Top Layer w0.9: ULN2803A.7@42.291,50.292 42.291,49.729 42.291,48.387 ?.7@45.085,45.593
j8: ?.8@47.625,45.593 ULN2803A.8@43.561,49.729 | length 6.9
  Top Layer w0.9: ULN2803A.8@43.561,50.292 43.561,49.729 43.561,48.814 45.032,47.343 45.875,47.343 ?.8@47.625,45.593
k1: ?.1@57.785,45.339 ULN2803A.1@63.119,49.729 | length 8
  Top Layer w0.9: ?.1@57.785,45.339 61.625,49.179 63.119,49.179 63.119,49.729 ULN2803A.1@63.119,50.292
k2: ?.2@60.325,45.339 ULN2803A.2@64.389,49.729 | length 7.1
  Top Layer w0.9: ?.2@60.325,45.339 62.075,47.089 62.918,47.089 64.389,48.56 64.389,49.729 ULN2803A.2@64.389,50.292
k3: ?.3@62.865,45.339 ULN2803A.3@65.659,49.729 | length 6.1
  Top Layer w0.9: ?.3@62.865,45.339 65.659,48.133 65.659,49.729 ULN2803A.3@65.659,50.292
k4: ?.4@65.405,45.339 ULN2803A.4@66.929,49.729 | length 5.6
  Top Layer w0.9: ?.4@65.405,45.339 66.929,46.863 66.929,49.729 ULN2803A.4@66.929,50.292
k5: ?.5@67.945,45.339 ULN2803A.5@68.199,49.729 | length 5.1
  Top Layer w0.9: ?.5@67.945,45.339 68.199,45.593 68.199,49.729 ULN2803A.5@68.199,50.292
k6: ?.6@70.485,45.339 ULN2803A.6@69.469,49.729 | length 5.4
  Top Layer w0.9: ULN2803A.6@69.469,50.292 69.469,49.729 69.469,46.355 ?.6@70.485,45.339
k7: ?. ULN2803A.7@70.739,49.729 | length 5.9
  Top Layer w0.9: ULN2803A.7@70.739,50.292 70.739,49.729 70.739,47.56 72.96,45.339 ?.
k8: ?.8@75.565,45.339 ULN2803A.8@72.009,49.729 | length 6.8
  Top Layer w0.9: ULN2803A.8@72.009,50.292 72.009,49.729 72.009,48.595 73.515,47.089 74.196,47.089 75.015,46.27 75.015,46.187 75.565,45.637 ?.8@75.565,45.339
l1: ?.1@85.471,45.085 ULN2803A.1@90.297,49.729 | length 7.8
  Top Layer w0.9: ?.1@85.471,45.085 85.536,45.085 87.286,46.835 88.064,46.835 90.297,49.068 90.297,49.729 ULN2803A.1@90.297,50.419
l2: ?.2@88.011,45.085 ULN2803A.2@91.567,49.729 | length 6.8
  Top Layer w0.9: ?.2@88.011,45.085 91.567,48.641 91.567,49.729 ULN2803A.2@91.567,50.419
l3: ?.3@90.551,45.085 ULN2803A.3@92.837,49.729 | length 6.3
  Top Layer w0.9: ?.3@90.551,45.085 92.837,47.371 92.837,49.729 ULN2803A.3@92.837,50.419
l4: ?.4@93.091,45.085 ULN2803A.4@94.107,49.729 | length 5.8
  Top Layer w0.9: ?.4@93.091,45.085 94.107,46.101 94.107,49.729 ULN2803A.4@94.107,50.419
l5: ?.5@95.631,45.085 ULN2803A.5@95.377,49.729 | length 5.4
  Top Layer w0.9: ULN2803A.5@95.377,50.419 95.377,49.729 95.377,46.117 95.421,46.073 95.421,45.295 ?.5@95.631,45.085
l6: ?.6@98.171,45.085 ULN2803A.6@96.647,49.729 | length 6
  Top Layer w0.9: ULN2803A.6@96.647,50.419 96.647,49.729 96.647,46.907 98.171,45.383 ?.6@98.171,45.085
l7: ?.7@100.711,45.085 ULN2803A.7@97.917,49.729 | length 6.5
  Top Layer w0.9: ULN2803A.7@97.917,50.419 97.917,49.729 97.917,47.814 100.646,45.085 ?.7@100.711,45.085
l8: ?.8@103.251,45.085 ULN2803A.8@99.187,49.729 | length 7.5
  Top Layer w0.9: ULN2803A.8@99.187,50.419 99.187,48.322 99.819,47.69 100.646,47.69 ?.8@103.251,45.085
m1: 10.1@74.374,126.157 PNP.3 | length 22.1
  Top Layer w0.9: v1(65.786,124.714) 65.996,124.924 65.996,125.642 68.011,127.657 71.652,127.657 73.152,126.157 10.1@74.374,126.157 ; PNP.3 68.319,119.095 68.319,118.244 68.583,117.98 v1(69.088,117.475)
  Bottom Layer w0.9: v1(65.786,124.714) 65.786,122.047 69.088,118.745 v1(69.088,117.475)
m2: 10.1@79.708,126.157 ?.3@73.45,119.095 | length 28.4
  Top Layer w0.9: v1(71.755,117.475) 72.009,117.475 73.279,118.745 ; 10.1@79.708,126.157 81.148,126.157 81.864,126.873 v1(82.296,126.873)
  Bottom Layer w0.9: v1(71.755,117.475) 71.755,118.694 68.148,122.301 68.148,124.217 70.804,126.873 v1(82.296,126.873)
m3: 10.1@85.042,126.157 ?.3@78.605,119.095 | length 14.9
  Top Layer w0.9: v1(78.605,117.221) ?.3@78.605,118.895 ; v1(80.01,123.85) 81.799,123.85 84.097,126.148 84.097,126.154 84.099,126.157 10.1@85.042,126.157
  Bottom Layer w0.9: v1(78.605,117.221) 78.605,120.814 80.01,122.22 v1(80.01,123.85)
m4: 10.1@90.121,126.157 ?.3@83.759,119.095 | length 14.2
  Top Layer w0.9: v1(82.55,117.348) 82.76,117.558 82.76,118.046 ?.3@83.609,118.895 ; v1(87.655,123.887) 87.655,124.104 89.708,126.157 10.1@90.121,126.157
  Bottom Layer w0.9: v1(82.55,117.348) 87.655,122.453 v1(87.655,123.887)
m5: 10.1@69.801,126.157 ?.3@88.913,119.095 | length 31.8
  Top Layer w0.9: 10.1@69.801,126.157 69.799,126.157 69.799,125.702 71.083,125.702 72.223,124.562 72.974,124.562 v1(73.685,123.85) ; v1(87.655,117.348) 87.866,117.558 87.866,118.474 88.486,119.095 88.913,119.095 ?.3@89.408,119.095
  Bottom Layer w0.9: v1(73.685,123.85) 73.685,122.987 73.863,122.809 73.863,115.893 75.37,114.386 79.015,114.386 80.227,115.598 83.275,115.598 85.025,117.348 v1(87.655,117.348)
m6: 10.1@95.455,126.157 ?.3@94.067,119.095 | length 18.6
  Top Layer w0.9: v1(93.167,117.348) 93.167,117.646 93.68,118.159 93.68,118.358 94.067,118.745 ; 10.1@95.455,126.157 96.328,126.157 98.171,124.314 v1(98.171,123.887)
  Bottom Layer w0.9: v1(93.167,117.348) 93.275,117.456 93.275,121.591 94.008,122.324 94.008,124.612 95.033,125.637 96.483,125.637 98.171,123.949 v1(98.171,123.887)
m7: 10.1@101.043,126.157 ?.3@99.993,119.095 | length 33.7
  Top Layer w0.9: 99.822,118.745 99.822,117.627 101.978,115.471 108.461,115.471 111.256,118.266 111.256,125.657 109.253,127.66 103.124,127.66 101.62,126.157 10.1@101.043,126.157
m8: 10.1@105.742,126.157 ?.3@105.148,119.095 | length 15
  Top Layer w0.9: ?.3@105.298,118.945 109.528,118.945 110.056,119.472 110.056,124.457 108.356,126.157 10.1@105.742,126.157
r1: 100.1@26.797,63.093 ULN2803A.18@34.671,58.729 | length 9.2
  Top Layer w0.9: 100.1@26.797,63.093 30.327,59.563 ULN2803A.18@34.507,59.563
r2: 100.1@30.058,63.093 ULN2803A.17@35.941,58.729 | length 27.3
  Top Layer w0.9: 100.1@30.058,63.093 28.956,63.093 28.956,64.618 24.638,64.618 24.638,58.42 26.416,56.642 34.925,56.642 35.941,57.658 35.941,58.729 ULN2803A.17@35.941,59.309
r3: 100.1@33.319,63.093 ULN2803A.16@37.211,58.729 | length 7.2
  Top Layer w0.9: 100.1@33.319,63.093 33.969,63.093 34.269,62.793 34.269,62.097 34.91,61.456 36.415,61.456 37.211,60.66 ULN2803A.16@37.211,58.729
r4: 100.1@36.58,63.093 ULN2803A.15@38.481,58.729 | length 5.2
  Top Layer w0.9: 100.1@36.58,63.093 37.23,63.093 100.1@37.53,62.793 ; 100.1@37.211,62.357 38.481,61.087 ULN2803A.15@38.481,58.729
r5: 100.1@39.841,63.093 ULN2803A.14@39.751,58.729 | length 5.1
  Top Layer w0.9: ULN2803A.14@39.751,58.039 39.751,58.729 39.751,60.949 39.841,61.039 100.1@39.841,63.093
r6: 100.1@43.102,63.093 ULN2803A.13@41.021,58.729 | length 6.3
  Top Layer w0.9: ULN2803A.13@41.021,58.039 41.021,58.729 41.021,60.43 42.152,61.561 42.152,62.793 42.452,63.093 100.1@43.102,63.093
r7: 100.1@46.363,63.093 ULN2803A.12@42.291,58.729 | length 7.6
  Top Layer w0.9: ULN2803A.12@42.291,58.039 42.291,58.729 42.291,59.817 43.468,60.994 44.214,60.994 45.413,62.193 45.413,62.793 45.713,63.093 100.1@46.363,63.093
r8: 100.1@49.624,63.093 ULN2803A.11@43.561,58.729 | length 12.6
  Top Layer w0.9: ULN2803A.11@43.561,59.309 43.561,58.729 43.561,57.074 44.088,56.547 44.834,56.547 47.422,59.135 47.422,60.681 48.971,62.23 48.971,63.093 100.1@49.624,63.093
vcc: 4.7k.2 10.2@69.801,129.257 10.2@74.374,129.257 10.2@79.708,129.257 10.2@85.042,129.257 10.2@90.121,129.257 10.2@95.455,129.257 10.2@101.043,129.257 10.2@105.742,129.257 ?.1@29.076,124.564 ?.1@38.868,119.926 | length 154.6
  Top Layer w0.9: v1@104.477,108.795 v1(104.521,108.839)
  Top Layer w1.5: 10.2@69.151,129.257 74.374,129.257 79.708,129.257 85.042,129.257 90.121,129.257 95.455,129.257 101.043,129.257 10.2@105.742,129.257
  Top Layer w1.8: v1(29.074,119.444) 29.137,119.507 ?.1@38.718,119.507 ; v1(29.083,128.622) 29.083,129.032 31.369,131.318 63.627,131.318 65.638,129.307 68.23,129.307 ; 4.7k.2@77.089,107.595 80.343,107.595 83.634,107.595 86.924,107.595 90.215,107.595 93.78,107.595 97.071,107.595 100.965,107.595 102.165,108.795 v1@104.477,108.795 ; 10.2@106.153,129.667 v1(111.252,129.667)
  Bottom Layer w1.8: v1(29.074,119.444) 29.083,119.453 29.083,124.564 29.08,124.568 29.08,128.619 v1(29.083,128.622) ; v1(104.521,108.839) 106.553,108.839 111.252,113.538 v1(111.252,129.667)
x1: 4.7k.1@77.089,104.495 470.2@76.708,99.975 PNP.1 | length 33
  Top Layer w0.9: PNP.1 67.339,122.095 67.008,121.764 66.3,121.764 64.108,119.573 64.108,116.435 66.018,114.525 68.474,114.525 73.053,109.946 73.053,105.446 74.004,104.495 77.089,104.495 77.089,100.275 76.789,99.975 470.2@76.708,99.975
x2: 4.7k.1@80.343,104.495 470.2@80.307,99.975 ?.1@73.45,122.095 | length 98.5
  Top Layer w0.9: v1(70.358,123.952) 70.736,123.952 70.838,123.85 72.593,122.095 ?.1@73.45,122.095 ; 4.7k.1@80.343,104.495 80.307,104.459 80.307,104.112 80.301,104.112 79.276,103.087 79.276,101.637 80.307,100.606 80.307,99.975 80.507,99.975 82.107,98.375 101.972,98.375 102.01,98.336 102.756,98.336 104.877,100.457 v1(105.689,100.457)
  Bottom Layer w0.9: v1(70.358,123.952) 70.568,124.162 71.523,124.162 72.961,125.6 81.094,125.6 81.571,125.123 83.492,125.123 85.471,127.102 101.29,127.102 102.613,125.778 102.613,121.632 101.19,120.209 101.19,104.956 v1(105.689,100.457)
x3: 4.7k.1@83.634,104.495 470.2@83.561,99.975 ?.1@78.605,122.095 | length 38.1
  Top Layer w0.9: v1(74.803,106.553) 74.803,114.12 76.2,115.517 v1(76.2,117.221) ; v1(77.165,123.85) 77.165,123.063 78.133,122.095 ?.1@78.605,122.095 ; v1(81.407,102.362) 82.007,101.762 82.007,100.337 82.307,100.037 82.245,99.975 83.561,99.975 83.634,100.048 4.7k.1@83.634,104.495
  Bottom Layer w0.9: v1(74.803,106.553) 76.835,106.553 81.026,102.362 v1(81.407,102.362) ; v1(76.2,117.221) 76.2,117.519 75.946,117.773 75.946,121.844 76.955,122.853 76.955,123.64 v1(77.165,123.85)
x4: 4.7k.1@86.924,104.495 470.2@86.815,99.975 ?.1@83.759,122.095 | length 38.2
  Top Layer w0.9: ?.1@83.759,122.095 84.159,122.095 84.686,122.622 84.686,123.294 84.963,123.571 v1(84.963,123.869) ; 470.2@86.815,99.975 86.924,99.975 86.924,103.601 ; 4.7k.1@86.924,104.495 86.924,103.601 ; v1(88.646,102.235) 88.29,102.235 86.924,103.601
  Bottom Layer w0.9: v1(84.963,123.869) 84.963,123.887 86.931,125.854 88.38,125.854 89.662,124.573 89.662,103.657 88.646,102.641 v1(88.646,102.235)
x5: 4.7k.1@90.215,104.495 470.2@90.07,99.975 ?.1@88.913,122.095 | length 36.2
  Top Layer w0.9: ?.1@88.486,122.095 88.913,122.095 89.408,122.095 89.408,123.887 v1(92.075,123.887) ; 4.7k.1@90.215,104.495 90.089,104.495 89.789,104.195 89.789,103.567 90.396,102.96 90.396,101.409 89.789,100.802 89.789,100.256 90.07,99.975 90.215,99.975 90.515,100.275 90.913,100.275 91.44,100.802 v1@91.44,101.872
  Bottom Layer w0.9: v1(91.948,102.032) 91.948,114.531 91.087,115.392 91.087,118.26 92.075,119.248 v1(92.075,123.887)
x6: 4.7k.1@93.78,104.495 470.2@93.599,99.975 ?.1@94.067,122.095 | length 32.5
  Top Layer w0.9: 93.532,103.47 94.672,102.33 v1(95.377,102.33) ; 470.2@93.599,99.975 93.58,99.975 93.28,100.275 93.28,100.889 93.698,101.307 93.698,102.757 93.28,103.174 93.28,104.195 93.58,104.495 4.7k.1@93.78,104.495 ; ?.1@94.067,122.095 94.972,122.095 95.548,122.67 95.548,123.676 v1(95.758,123.887)
  Bottom Layer w0.9: v1(95.377,102.33) 95.232,102.475 95.232,123.361 v1(95.758,123.887)
x7: 4.7k.1@97.071,104.495 470.2@96.853,99.975 ?.1@99.993,122.095 | length 34
  Top Layer w0.9: 470.2@96.853,99.975 97.127,100.249 97.127,104.439 97.071,104.495 98.45,104.495 98.45,102.667 v1(98.958,102.159) ; ?.1@99.573,121.995 99.993,121.968 100.327,122.073 100.959,122.705 101.092,122.84 101.092,123.317 v1(100.584,123.825)
  Bottom Layer w0.9: v1(98.958,102.159) 98.958,121.742 100.584,123.368 v1(100.584,123.825)
x8: 4.7k.1@100.965,104.495 470.2@100.711,99.975 ?.1@105.148,122.095 | length 35.9
  Top Layer w0.9: 470.2@100.711,99.975 100.711,104.241 100.965,104.495 104.874,104.495 108.049,107.67 108.049,111.218 105.856,113.411 v1(104.521,113.411) ; v1(104.409,123.825) 104.409,122.439 104.753,122.095 105.148,122.095 ?.1@105.348,122.095
  Bottom Layer w0.9: v1(104.409,123.825) 103.991,123.825 103.813,123.647 103.813,120.857 102.39,119.434 102.39,116.75 104.521,114.619 v1(104.521,113.411)
y1: 
y2: 
y3: 
y4: 
y5: 
y6: 
y7: 
y8: 
pads on no net: ULN2803A.10

## Keep-outs
Keep-Out Layer:
  lines w0.7: 23.495,43.307 112.903,43.307 112.903,132.89 23.495,132.89 23.495,43.307

## Other copper
Bottom Layer:
  text "2023-EE-21      AliMaaz" at 56.426,109.728 h2

## Text inside footprints (layer, text, board x,y; h text height)
Capacitor: Top Overlay "+" at 46.595,123.075 h1.5
?: Top Overlay "Block Connector" at 28.067,122.428 h0.5